# Altium PCB МПСУ.687251.22-02.PcbDoc
Units mm, origin at the board's own origin, x right, y up, seen from the top; angles counter-clockwise.
Board outline 55.5 x 18.5 mm, 2 copper layers (Top Layer, Bottom Layer), stack 2.036 mm thick; 28 components, 38 nets, 160 pads, 111 vias.
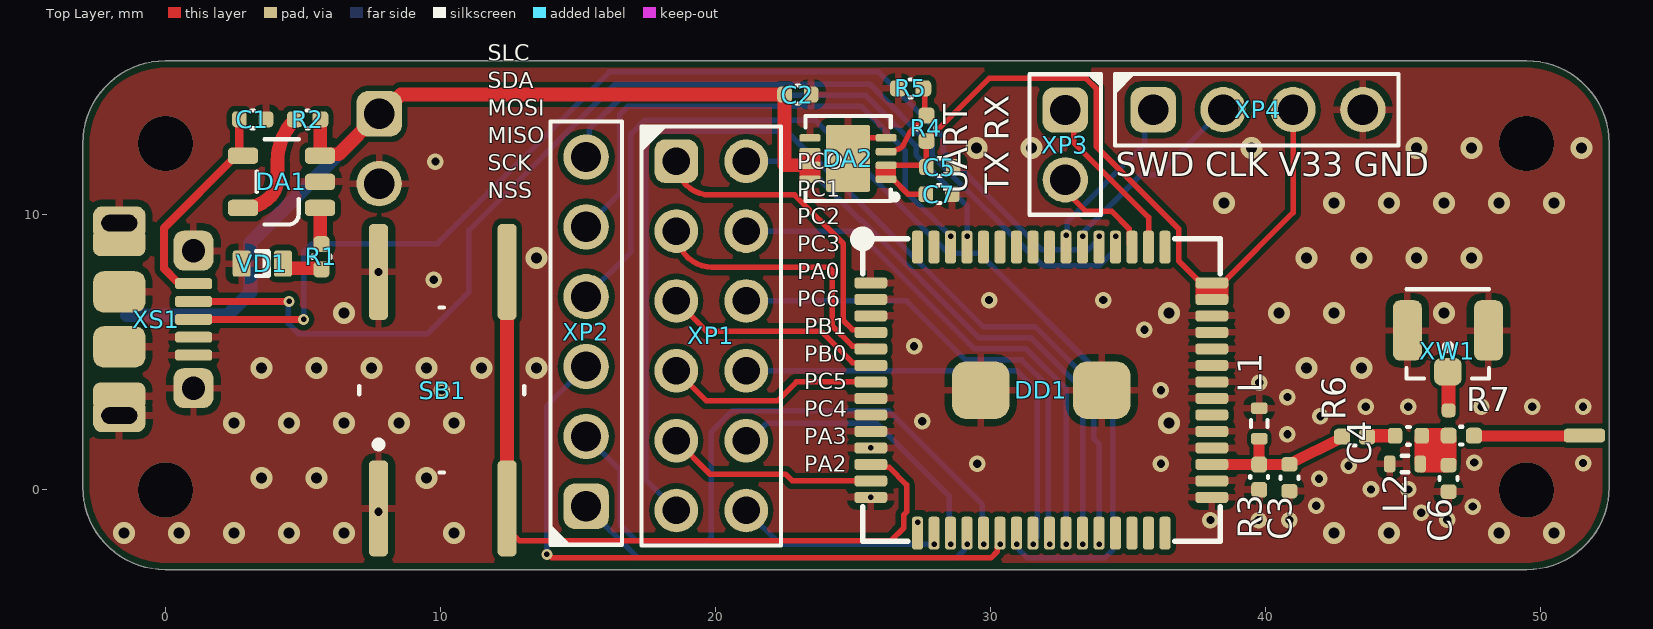
[diagram p0: Top Layer view]
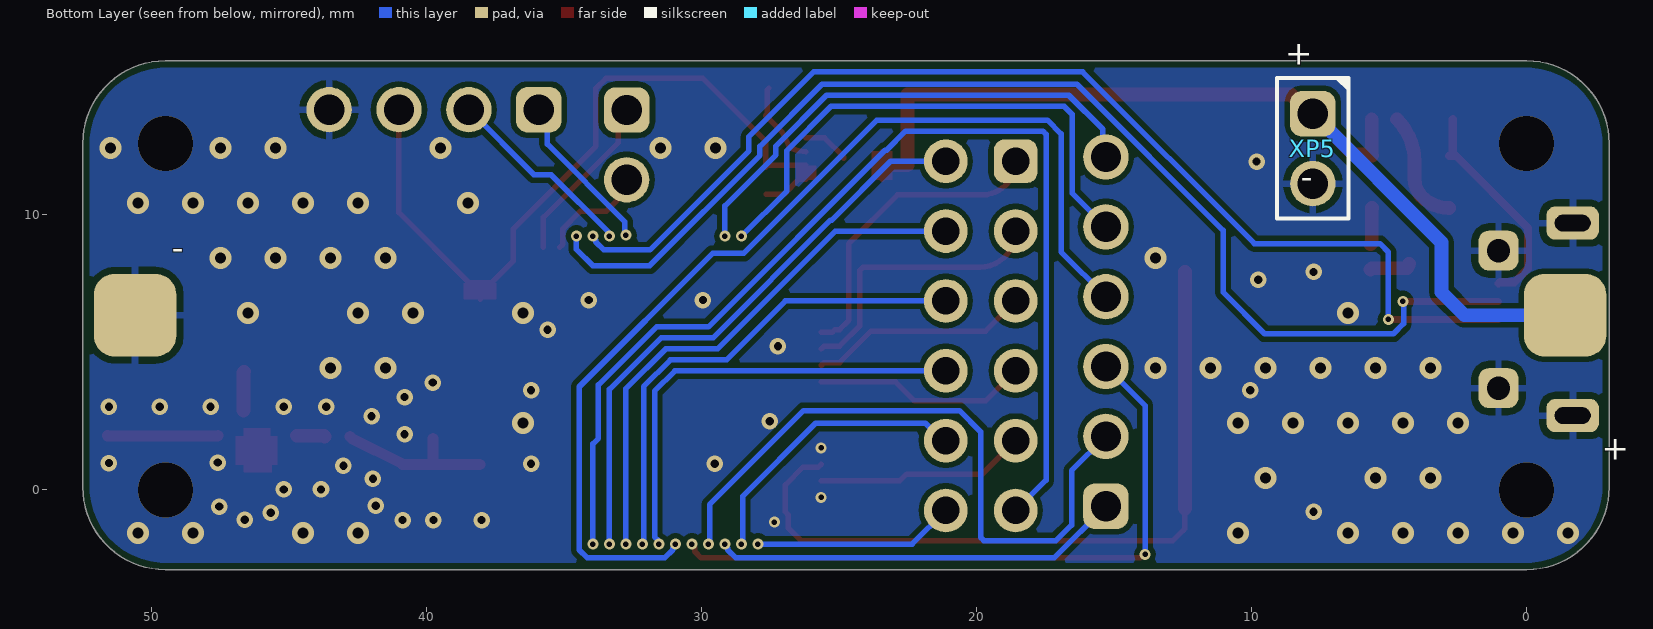
[diagram p1: Bottom Layer view, seen from below]
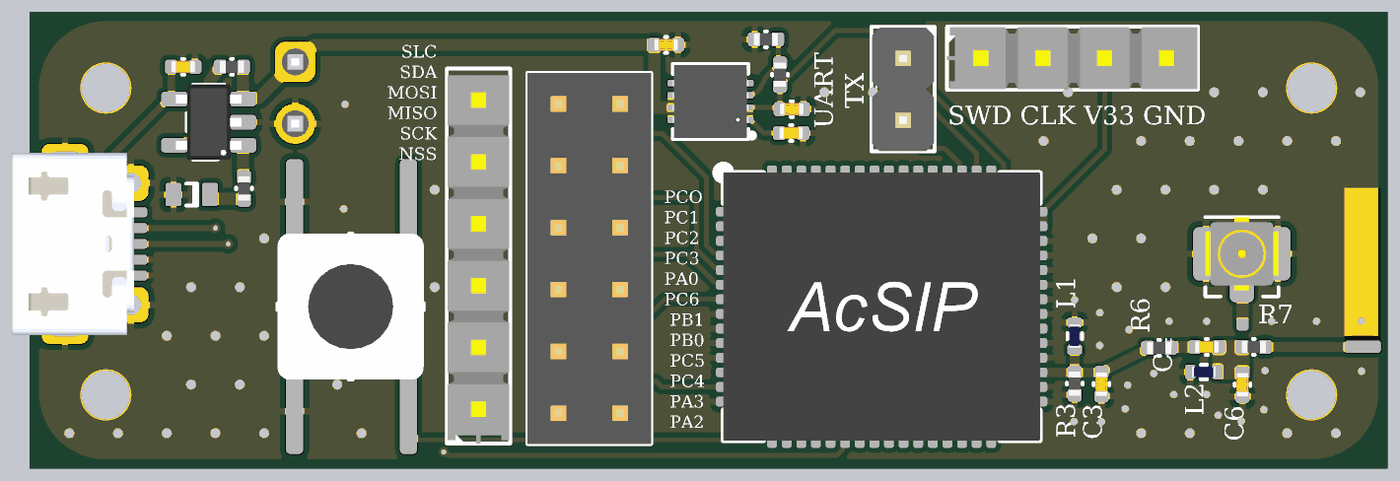
[diagram p2: 3D render of the assembled board from above, using the file's embedded part models]

## Layer stack, top to bottom
Top Solder: solder mask 0.0254, SM-001, Dk 4
Top Layer: signal copper 0.018
FR4: core 2, FR4, Dk 4.6
Bottom Layer: signal copper 0.018
Bottom Solder: solder mask 0.0254, SM-001, Dk 4

## Board outline
-3,0.098 -3,12.598 cw(c0,12.598) 0,15.598 49.5,15.598 cw(c49.5,12.598) 52.5,12.598 52.5,0.098 cw(c49.5,0.098) 49.5,-2.902 0,-2.902 cw(c0,0.098)

## Design rules (kind name [scope] priority, off if disabled: settings)
BoardOutlineClearance SolderMask [OnSolderMask] p1: gap=0 ignorepadtopadclearanceinfootprint=FALSE except(0.25: Arc-CavityEdge Arc-SplitContinuation Track-CavityEdge Track-SplitContinuation SMDPad-CavityEdge SMDPad-SplitContinuation THPad-CavityEdge THPad-SplitContinuation Via-CavityEdge Via-SplitContinuation Fill-CavityEdge Fill-SplitContinuation Poly-CavityEdge Poly-SplitContinuation Region-CavityEdge Region-SplitContinuation Text-CavityEdge Text-SplitContinuation)
BoardOutlineClearance [All] p2: gap=0.25 ignorepadtopadclearanceinfootprint=FALSE
Clearance Clearance_RF [All vs InNetClass('RF')] p1: gap=0.15 ignorepadtopadclearanceinfootprint=FALSE
Clearance [All] p2: gap=0.2 ignorepadtopadclearanceinfootprint=FALSE
ComponentClearance [All] p1: gap=0.25 collisioncheckmode=3 verticalgap=0.25 showdistances=FALSE
DiffPairsRouting [All] p1: maxlimit=0.25 minlimit=0.25 mostfreqgap=0.25 toplayer_minwidth=0.2 toplayer_maxwidth=1 toplayer_prefwidth=0.4 bottomlayer_minwidth=0.2 bottomlayer_maxwidth=1 bottomlayer_prefwidth=0.4 maxuncoupledlength=10
HoleSize [All] p1: absolutevalues=TRUE maxlimit=8 minlimit=0.3 maxpercent=80.000 minpercent=20.000
HoleToHoleClearance [All] p1: gap=0.3 allowstackedmicrovias=TRUE
MinimumSolderMaskSliver [All] p1: minsoldermaskwidth=0.15
PlaneClearance [All] p1: clearance=0.5
PlaneConnect [All] p1: planeconnectstyle=Relief reliefexpansion=0.5 reliefentries=4 reliefconductorwidth=0.25 reliefairgap=0.25
PolygonConnect [All] p1: thpad.connectstyle=Relief thpad.reliefconductorwidth=0.25 thpad.reliefentries=4 thpad.polygonreliefangle="90 Angle" thpad.airgapwidth=0.25 smdpad.connectstyle=Relief smdpad.reliefconductorwidth=0.25 smdpad.reliefentries=4 smdpad.polygonreliefangle="90 Angle" smdpad.airgapwidth=0.25 via.connectstyle=Direct via.reliefconductorwidth=0.25 via.reliefentries=4 via.polygonreliefangle="90 Angle" via.airgapwidth=0.25
ReturnPath [All] p1: impedanceprofileid={2CF304FD-49DA-4276-8468-CD12DB598121} _gaplimit=0.5
RoomDefinition "МПСУ.464414.22-01 Sheet1" [InComponentClass('МПСУ.464414.22-01 Sheet1')] p1: confinementstyle=ConfineIn formatcopy=TRUE lockcomponents=FALSE outline -663.5,-687.577 -612.7,-687.577 -612.7,-662.177 -663.5,-662.177
RoutingCorners [All] p1: cornerstyle=45-Degree minsetback=2.5 maxsetback=2.5
RoutingVias [All] p1: holewidth=0.2 width=0.4 viastyle="Through Hole" minholewidth=0 minwidth=0 maxholewidth=5 maxwidth=5
SilkToSilkClearance [All] p1: silktosilkclearance=0.05
SilkToSolderMaskClearance [IsPad] p1: minsilkscreentomaskgap=0.05 clearancetoexposedcopper=TRUE
SolderMaskExpansion [All] p1: expansion=0.05 istentingtop=FALSE
UnRoutedNet [All] p1: checkbadconnections=TRUE
Width [All] p1: maxlimit=3 minlimit=0.2 preferedwidth=0.25
19 further rules are at their usual default settings.

## Classes and differential pairs
net class RF: NetC4_1 NetC4_2 NetX1_1 RF

## Components (designator, comment, footprint, x,y, rotation, side; value= is the part's Value field where it differs from the comment)
C1 "100 мкФ ± 0 % 0 В  0402" CAPC100X50X55L20N 3.175,13.473 r180 top value="100 мкФ"
C2 "100 мкФ ± 0 % 0 В  0402" CAPC100X50X55L20N 23,14.373 r0 top value="100 мкФ"
C3 "TBD ± 0 % 0 В  0402" CAPC100X50X55L20N 40.875,0.438 r270 top value=TBD
C4 "56мкФ ± 0 % 0 В  0402" CAPC100X50X55L20N 45.201,1.966 r180 top value=56мкФ
C5 "100 мкФ ± 0 % 0 В  0402" CAPC100X50X55L20N 28.16,11.733 r180 top value="100 мкФ"
C6 "TBD ± 0 % 0 В  0402" CAPC100X50X55L20N 46.663,0.416 r270 top value=TBD
C7 "0.1 мкФ ± 0 % 0 В  0402" CAPC100X50X55L20N 28.135,10.748 r0 top value="0.1 мкФ"
DA1 "MCP73831T-2ACI/OT" SOTFL95P270X145-5N 4.225,11.198 r180 top
DA2 "LT1965*DD" SON9P50_300X300X80L40X25T244X160N 24.825,12.048 r90 top
DD1 "" S7XS 31.85,3.623 r0 top
L1 "TBD ± 0 % 0 А 0402" INDC100X50X60L10N 39.775,2.413 r90 top value=TBD
L2 "TBD ± 0 % 0 А 0402" INDC100X50X60L10N 45.076,0.941 r180 top value=TBD
R1 "470 Ом ± 0 % 0 Вт 0402" RESC100X50X40L25N 5.675,8.473 r270 top value="470 Ом"
R2 "5 кОм ± 0 % 0 Вт 0402" RESC100X50X40L25N 5.175,13.473 r0 top value="5 кОм"
R3 "0 Ом ± 0 % 0 Вт 0402" RESC100X50X40L25N 39.775,0.463 r270 top value="0 Ом"
R4 "4,42 кОм ± 0 % 0 Вт 0402" RESC100X50X40L25N 27.675,13.148 r90 top value="4,42 кОм"
R5 "3,01 кОм ± 0 % 0 Вт 0402" RESC100X50X40L25N 27.1,14.598 r180 top value="3,01 кОм"
R6 "0 Ом ± 0 % 0 Вт 0402" RESC100X50X40L25N 43.241,1.931 r0 top value="0 Ом"
R7 "0 Ом ± 0 % 0 Вт 0402" RESC100X50X40L25N 47.123,1.969 r0 top value="0 Ом"
SB1 "" KLS7-TS6601 10.05,3.623 r90 top
VD1 "KP-1608ZGC" KP-1608ZGC 3.525,8.223 r180 top
XP1 "DS1021-2x6SF11-B" HDRV12W64P254_6X2_1524X508H600 19.85,5.598 r270 top
XP2 "TSW-106-07-G-S" TSW-106-07-G-S 15.3,7.023 r90 top
XP3 "TSW-102-07-G-S" TSW-102-07-G-S 32.725,13.813 r270 top
XP4 "TSW-104-07-G-S" TSW-104-07-G-S 39.735,13.823 r0 top
XP5 "TSW-102-07-G-S" TSW-102-07-G-S 7.775,13.673 r270 bottom
XS1 "10118194-0001LF" micro_USB_TH -1.075,6.198 r270 top
XW1 "U.FL-LP1" U.FL-LP 46.638,5.794 r0 top

## Footprints (in the part's own frame and the unit in brackets; to place one, negate y for a bottom-side part, rotate by r counter-clockwise, add the part's x,y. Pads: shape width x height; smd on the part's side, far side on the other; paste and mask are expansions set on the pad)
CAPC100X50X55L20N [mm] "Capacitor, Chip; 1.00 mm L X 0.50 mm W X 0.55 mm H body"
  rrect50% 0.53x0.58 smd: 1(-0.485,0) 2(0.485,0)
  silkscreen extent -0.05,-0.33 0.05,0.33, body extent -0.5,-0.25 0.5,0.25, height 0.55
HDRV12W64P254_6X2_1524X508H600 [mm] "Header, Vertical, 2.54 mm pitch; 0.64 mm lead width, 12 pins, 2 rows, 6 pins per row, 15.24 mm L X 5.08 mm W X 6.00 mm H body"
  rrect50% 1.59x1.59 hole 1: 1(-6.35,-1.27)
  round 1.59 hole 1: 2(-6.35,1.27) 3(-3.81,-1.27) 4(-3.81,1.27) 5(-1.27,-1.27) 6(-1.27,1.27) 7(1.27,-1.27) 8(1.27,1.27) 9(3.81,-1.27) 10(3.81,1.27) 11(6.35,-1.27) 12(6.35,1.27)
  silkscreen extent -7.62,-2.54 7.62,2.54, body extent -7.62,-2.54 7.62,2.54, height 6
INDC100X50X60L10N [mm] "Inductor, Chip; 1.00 mm L X 0.50 mm W X 0.60 mm H body"
  rrect50% 0.42x0.61 smd: 1(-0.555,0) 2(0.555,0)
  silkscreen extent -0.13,-0.3 0.13,0.3, body extent -0.5,-0.25 0.5,0.25, height 0.6
KLS7-TS6601 [mm] "Button"
  rrect50% 3.5x0.7 smd: 1(-4.3,2.3) 1(4.3,2.3) 2(-4.3,-2.376) 2(4.3,-2.376)
  silkscreen extent -3,-3 3,3, body extent -3,-3 3,3, height 13
KP-1608ZGC [mm] "SODFL, 2-Leads, Body 0,80x1,60mm, IPC Medium Density"
  rrect25% 0.65x0.95 smd: 1(-0.75,0) 2(0.75,0)
  silkscreen extent -0.3,-0.45 0.23,0.45, body extent -0.8,-0.37 0.8,0.38, height 1.1
micro_USB_TH [mm]
  rrect50% 0.4x1.35 smd: 1(-1.3,2.1) 2(-0.65,2.1) 3(0,2.1) 4(0.65,2.1) 5(1.3,2.1)
  rrect50% 1.2x1.9 hole 1.3 slot 0.6 at 0 deg: 5(-3.5,-0.6) 5(3.5,-0.6)
  rrect50% 1x1.9 smd: 5(-2.8,-0.6) 5(2.8,-0.6)
  rrect50% 1.45x1.45 hole 0.85: 5(-2.5,2.1) 5(2.5,2.1)
  rrect50% 1.5x1.9 smd: 5(-1,-0.6) 5(1,-0.6)
  body extent -3.75,-2.77 3.75,2.24, height 2.64
RESC100X50X40L25N [mm] "Resistor, Chip; 1.00 mm L X 0.50 mm W X 0.40 mm H body"
  rrect50% 0.58x0.58 smd: 1(-0.46,0) 2(0.46,0)
  silkscreen extent -0.04,-0.33 0.04,0.33, body extent -0.5,-0.25 0.5,0.25, height 0.4
S7XS [mm] "S7XS"
  rrect50% 1.2x0.4 smd mask-0.05: 1(-6.2,3.9) 2(-6.2,3.3) 3(-6.2,2.7) 4(-6.2,2.1) 5(-6.2,1.5) 6(-6.2,0.9) 7(-6.2,0.3) 8(-6.2,-0.3) 9(-6.2,-0.9) 10(-6.2,-1.5) 11(-6.2,-2.1) 12(-6.2,-2.7) 13(-6.2,-3.3) 14(-6.2,-3.9) 31(6.2,-3.9) 32(6.2,-3.3) 33(6.2,-2.7) 34(6.2,-2.1) 35(6.2,-1.5) 36(6.2,-0.9) 37(6.2,-0.3) 38(6.2,0.3) 39(6.2,0.9) 40(6.2,1.5) 41(6.2,2.1) 42(6.2,2.7) 43(6.2,3.3) 44(6.2,3.9)
  rrect50% 0.4x1.2 smd mask-0.05: 15(-4.5,-5.2) 16(-3.9,-5.2) 17(-3.3,-5.2) 18(-2.7,-5.2) 19(-2.1,-5.2) 20(-1.5,-5.2) 21(-0.9,-5.2) 22(-0.3,-5.2) 23(0.3,-5.2) 24(0.9,-5.2) 25(1.5,-5.2) 26(2.1,-5.2) 27(2.7,-5.2) 28(3.3,-5.2) 29(3.9,-5.2) 30(4.5,-5.2) 45(4.5,5.2) 46(3.9,5.2) 47(3.3,5.2) 48(2.7,5.2) 49(2.1,5.2) 50(1.5,5.2) 51(0.9,5.2) 52(0.3,5.2) 53(-0.3,5.2) 54(-0.9,5.2) 55(-1.5,5.2) 56(-2.1,5.2) 57(-2.7,5.2) 58(-3.3,5.2) 59(-3.9,5.2) 60(-4.5,5.2)
  rrect50% 2.1x2.1 smd mask-0.05: 61(-2.2,0) 62(2.2,0)
  silkscreen extent -6.7,-5.5 6.5,5.7, body extent -6.5,-5.5 6.5,5.5, height 1.14
SON9P50_300X300X80L40X25T244X160N [mm] "Small Outline No-Lead (SON with Tab), 0.50 mm pitch; 8 pin, 3.00 mm L X 3.00 mm W X 0.80 mm H body"
  rrect50% 0.27x0.76 smd: 1(-0.75,-1.385) 2(-0.25,-1.385) 3(0.25,-1.385) 4(0.75,-1.385) 5(0.75,1.385) 6(0.25,1.385) 7(-0.25,1.385) 8(-0.75,1.385)
  rrect10% 2.44x1.6 smd: 9(0,0)
  silkscreen extent -1.55,-1.78 1.55,1.55, body extent -1.5,-1.55 1.5,1.55, height 0.8
SOTFL95P270X145-5N [mm] "SOTFL, 5-Leads, Body 2,90x2,70mm, Pitch 0,95mm, IPC Medium Density"
  rrect50% 1.1x0.6 smd: 1(-1.4,0.95) 2(-1.4,0) 3(-1.4,-0.95) 4(1.4,-0.95) 5(1.4,0.95)
  silkscreen extent -0.63,-1.55 0.9,1.55, body extent -1.35,-1.55 1.35,1.55, height 1.45
TSW-102-07-G-S [mm]
  rrect50% 1.65x1.65 hole 1.1: 1(0,0)
  round 1.65 hole 1.1: 2(2.54,0)
  silkscreen extent -1.3,-1.3 3.81,1.3, body extent -1.27,-1.27 3.81,1.27, height 8.38
TSW-104-07-G-S [mm]
  rrect50% 1.65x1.65 hole 1.1: 1(-3.81,0)
  round 1.65 hole 1.1: 2(-1.27,0) 3(1.27,0) 4(3.81,0)
  silkscreen extent -5.2,-1.3 5.1,1.3, body extent -5.21,-1.27 5.08,1.27, height 8.38
TSW-106-07-G-S [mm]
  rrect50% 1.65x1.65 hole 1.1: 1(-7.62,0)
  round 1.65 hole 1.1: 2(-5.08,0) 3(-2.54,0) 4(0,0) 5(2.54,0) 6(5.08,0)
  silkscreen extent -9.02,-1.3 6.38,1.3, body extent -9.02,-1.27 6.1,1.27, height 8.38
U.FL-LP [mm]
  rrect50% 1x1 smd: 1(0,-1.5)
  rrect50% 1.05x2.2 smd: 2(-1.475,0) 2(1.475,0)
  silkscreen extent -1.5,-1.75 1.5,1.5, body extent -1.5,-1.5 1.5,1.5, height 1.25

## Part data
C1 C2 C3 C4 C5 C6 C7: library part "C 0402", "Capacitor 0402", Package=0402, Tolerance="0 %", 3D_Body=+, Category=Passive, Designer=Свидерский, Peak_Condition="0 В", Status=Approved, Subcategory=Capacitor
DA1: library part MCP7383*, "Miniature Single-Cell, Fully Integrated Li-Ion, / Li-Polymer Charge Management Controllers", Manufacturer=Microchip, 3D_Body=+, Category=IC, ComponentLink1Description="Техническое описание", ComponentLink1URL=Q:\Libs\Descriptions_PDF\MCP73831-2.pdf, Designer=Лазба, PartNumber=MCP73831T-2ACI/OT, Status=Check, Subcategory="Power Supply"
DA2: "1.1A, Low Noise,  Low Dropout Linear Regulator", Manufacturer="Analog Devices", Package="8-LEAD (3mm × 3mm) PLASTIC DFN", 3D_Body=+, Category=IC, ComponentLink1Description="Техническое описание", ComponentLink1URL=Q:\Libs\Descriptions_PDF\LT1965.pdf, Designer=Свидерский, PartNumber=LT1965*DD, Status=Approved, Subcategory="Power Supply"
DD1: library part S76S, "The S76S is designed & manufactured in a smallest form factor - SiP ( System in Package ). It integrate with Semtech SX1276 and a 32-bit ultra low power Cortex M0L MCU ( STM32L073x ), supporting global 863MHz ~ 928MHz ISM-Bands.", Manufacturer=AcSIP, 3D_Body=+, Category=IC, ComponentLink1Description="Техническое описание", ComponentLink1URL="Q:\Libs\Descriptions_PDF\AcSIP S76S.pdf", Designer=Лазба, PartNumber=S76S, Status=Check, Subcategory=MCU
L1 L2: library part "L 0402", "Inductor 0402", Package=0402, Tolerance="0 %", 3D_Body=+, Category=Passive, Designer=Свидерский, Peak_Condition="0 А", Status=Approved, Subcategory=Inductor
R1 R2 R3 R4 R5 R6 R7: library part "R 0402", "Resistor 0402", Package=0402, Tolerance="0 %", 3D_Body=+, Category=Passive, Designer=Свидерский, Peak_Condition="0 Вт", Status=Approved, Subcategory=Resistor
SB1: library part KLS7-TS6601*, "6x6 Tact Switch Series", Manufacturer="KLS electronic co ltd", PartNumber=KLS7-TS6601-13-180, 3D_Body=+, Category=Passive, ComponentLink1Description="Техническое описание", ComponentLink1URL=Q:\Libs\Descriptions_PDF\KLS7-TS6601.pdf, Designer=Лазба, Status=Check, Subcategory=Button
VD1: library part KP-1608***, "1.6X0.8mm SMD CHIP LED LAMP", Manufacturer=Kingbright, Package="1.6mmX0.8mm SMD LED", 3D_Body=+, Category=Discrete, ComponentLink1Description="Техническое описание", ComponentLink1URL=Q:\Libs\Descriptions_PDF\KP-1608ZGC.pdf, Designer=Ушакова, PartNumber=KP-1608ZGC, Status=Approved, Subcategory=Diode
XP1: "Вилка 2,54мм", Manufacturer="Connfly Electronic", 3D_Body=+, Category=Connector, ComponentLink1Description="Техническое описание", ComponentLink1URL=Q:\Libs\Descriptions_PDF\DS1021.pdf, Designer=Свидерский, PartNumber=DS1021-2x6SF11-B, Pins=2x6, Pitch=2.54mm, Status=Approved, Subcategory=Male, System=Connector
XP2 XP4: "Вилка 2,54 мм", Manufacturer=Samtec, 3D_Body=+, Category=Connector, ComponentLink1Description="Техническое описание", ComponentLink1URL=Q:\Libs\Descriptions_PDF\tsw_th.pdf, Pitch=2.54mm, Status=Check, Subcategory=Male, System=Connector
  XP2: Designer=Лазба, PartNumber=TSW-106-07-G-S, Pins=1x6
  XP4: Designer=Затонская, PartNumber=TSW-104-07-G-S, Pins=1x4
XP3 XP5: "2x1 Вилка 2,54 мм", Manufacturer=Samtec, 3D_Body=+, Category=Connector, ComponentLink1Description="Техническое описание", ComponentLink1URL=Q:\Libs\Descriptions_PDF\tsw_th.pdf, Designer=Погорельский, PartNumber=TSW-102-07-G-S, Pins=2х1, Pitch=2.54mm, Status=Check, Subcategory=Male, System=Connector
XS1: "micro USB, Through Hole Mount", Manufacturer="Amphenal ICC", 3D_Body=+, Category=Connector, ComponentLink1Description="Техническое описание", ComponentLink1URL=Q:\Libs\Descriptions_PDF\10118194-0001LF.pdf, Designer=Свидерский, PartNumber=10118194-0001LF, Pins=5, Pitch=-, Status=Approved, Subcategory=microUSB, System=Connector
XW1: library part U.FL-R-SMT, "RF connector, Right Angle Jack PCB SMA Female End Launch Connector", Manufacturer="Hirose Electric", 3D_Body=+, Category=Connector, ComponentLink1Description="Техническое описание", ComponentLink1URL=Q:\Libs\Descriptions_PDF\U.FL-R-SMT(01).pdf, Designer=Лазба, PartNumber=U.FL-LP1, Pins=UFL, Status=Check, Subcategory=RF, System=Connector

## Free pads (board coordinates)
  rrect50% 0.5x0.5 smd: 1(46.663,2.889)
  rrect50% 3x3 smd far side: 8(-1.4,6.348) 8(50.6,6.348)
  rrect50% 1.5x0.5 smd: 8(51.6,1.973)

## Via types
v1: diameter 0.8, hole 0.4, Top Layer to Bottom Layer, tented both sides, 49 vias
v2: diameter 0.6, hole 0.3, Top Layer to Bottom Layer, tented both sides, 35 vias
v3: diameter 0.4, hole 0.2, Top Layer to Bottom Layer, tented both sides, 23 vias
v4: diameter 2/2 (per signal layer), hole 2, Top Layer to Bottom Layer, 4 vias

## Nets (pads, with @x,y where several pads share a name; then routed paths per layer and width w, separated by ;. In a path a pad name is that pad's centre, name@x,y a point inside that pad or via, vN(x,y) a via of type N, cw(c..) or ccw(c..) an arc to the next point about the centre after c; other vN are vias at no path point)
ACC_V: C2.1 DA1.3 DA2.6 DA2.7 DA2.8 pad.8@-1.4,6.348 R2.2 XP5.1 | length 36.9
  Top Layer w0.2: DA2.8 DA2.6
  Top Layer w0.5: DA1.3 DA1.3@5.635,12.148 ; R2.2 DA1.3@5.635,12.148 ; DA2.7 22.515,11.798 C2.1 8.563,14.373 7.863,13.673 XP5.1 6.3,12.198 5.685,12.198 DA1.3@5.635,12.148
  Bottom Layer w0.5: pad.8@-1.4,6.348 2.262,6.348 3.1,7.187 3.1,8.998 XP5.1
GND: C1.1 C2.2 C3.2 C5.1 C6.2 C7.2 DA1.2 DA2.4 DA2.5 DA2.9 DD1.1 DD1.2 DD1.3 DD1.8 DD1.9 DD1.10 DD1.11 DD1.14 DD1.15 DD1.31 DD1.32 DD1.34 DD1.35 DD1.37 DD1.38 DD1.39 DD1.40 DD1.41 DD1.42 DD1.61 DD1.62 L1.2 L2.2 pad.8@50.6,6.348 R3.2 R5.2 SB1.1 VD1.2 XP4.4 XP5.2 XS1.4 XS1.5 XW1.2 | length 1.7
  Top Layer w0.2: DA2.9 24.825,12.098 25.525,12.798 DA2.4
  other v1: -1.5,-1.576 0.5,-1.576 2.5,-1.576 4.5,-1.576 6.5,-1.576 10.5,-1.576 42.5,-1.576 44.5,-1.576 48.5,-1.576 50.5,-1.576 3.5,0.424 5.5,0.424 9.5,0.424 2.5,2.424 4.5,2.424 6.5,2.424 8.5,2.424 10.5,2.424 36.5,2.424 3.5,4.424 5.5,4.424 7.5,4.424 9.5,4.424 11.5,4.424 13.5,4.424 41.5,4.424 43.5,4.424 6.5,6.424 36.5,6.424 40.5,6.424 42.5,6.424 46.5,6.424 13.5,8.424 41.5,8.424 43.5,8.424 45.5,8.424 47.5,8.424 38.5,10.424 42.5,10.424 44.5,10.424 46.5,10.424 48.5,10.424 50.5,10.424 29.5,12.424 31.5,12.424 39.5,12.424 45.5,12.424 47.5,12.424 51.5,12.424
  other v2: 38,-1.102 39.75,-1.102 40.875,-1.102 46.616,-1.084 45.666,-0.834 7.75,-0.802 47.541,-0.609 41.85,-0.575 43.841,0.016 45.191,0.016 41.95,0.4 43.025,0.875 29.525,0.948 36.2,0.948 51.55,0.973 47.591,0.991 40.8,2.025 27.524,2.498 42,2.675 43.65,3.023 45.191,3.023 47.857,3.023 49.704,3.023 51.55,3.023 40.8,3.375 10.05,3.623 36.2,3.623 39.775,3.898 27.225,5.223 35.6,5.823 29.95,6.898 34.1,6.898 9.764,7.637 7.75,7.923 9.819,11.936
  other v3: 27.35,-1.177 25.65,-0.277 25.65,1.523
  other v4: 0,0 49.5,0 0,12.598 49.5,12.598
NetC1_2: C1.2 DA1.4 XS1.1 | length 8.1
  Top Layer w0.3: XS1.1 0.975,7.548 0.442,7.548 -0.05,8.041 -0.05,9.523 2.575,12.148 DA1.4 cw(c2.825,12.283) 2.69,12.283 C1.2
NetC4_1: C4.1 C6.1 L2.1 R7.1
NetC4_2: C4.2 R6.2 | length 1
  Top Layer w0.5: R6.2 cw(c43.785,1.847) 43.785,1.966 C4.2
NetDA1_1: DA1.1 R1.1 | length 1.3
  Top Layer w0.5: DA1.1 5.635,10.198 5.635,8.973 R1.1
NetDA1_5: DA1.5 R2.1 | length 4.2
  Top Layer w0.5: DA1.5 ccw(c2.825,11.637) 3.807,10.655 ccw(c3.159,11.303) 4.075,11.303 4.075,11.928 cw(c6.26,11.928) R2.1
NetDA2_3: DA2.3 R4.2 R5.1 | length 3.1
  Top Layer w0.2: DA2.3 26.49,12.333 26.637,12.382 ccw(c26.523,12.731) 26.849,12.562 27.085,13.018 R4.2 27.617,13.666 27.617,14.541 R5.1
NetDD1_12: DD1.12 SB1.2 | length 27.4
  Top Layer w0.2: SB1.2@12.426,-0.677 12.426,-1.411 12.476,-1.461 12.862,-1.847 26.388,-1.847 26.85,-1.385 26.85,-0.911 26.957,-0.804 26.957,0.182 26.316,0.823 25.75,0.823 DD1.12
  Top Layer w0.5: SB1.2@12.426,-0.677 SB1.2@12.426,7.923
NetR1_2: R1.2 VD1.1 | length 1.5
  Top Layer w0.5: VD1.1 4.35,8.053 5.635,8.053 R1.2
NetR7_2: pad.8@51.6,1.973 R7.2 | length 4
  Top Layer w0.4: R7.2 47.591,1.961 47.607,1.961 51.6,1.961 pad.8@51.6,1.973
NetX1_1: pad.1 XW1.1 | length 1.4
  Top Layer w0.5: XW1.1 cw(c46.578,4.233) 46.663,4.233 pad.1
PA0: DD1.13 XP1.9 | length 7.7
  Top Layer w0.2: XP1.9 19.795,0.573 22.55,0.573 22.8,0.323 DD1.13
PA2: DD1.16 XP1.12 | length 7.3
  Bottom Layer w0.2: XP1.12 22.345,-1.977 v3(27.95,-1.977)
PA3: DD1.17 XP1.10 | length 10.5
  Bottom Layer w0.2: XP1.10 21.233,1.788 21.868,2.423 25.85,2.423 28.512,-0.238 28.512,-1.938 v3(28.55,-1.977)
PB0: DD1.24 XP1.4 | length 19.7
  Bottom Layer w0.2: XP1.4 25.14,9.408 29.42,5.128 31.304,5.128 32.75,3.683 v3(32.75,-1.977)
PB1: DD1.25 XP1.2 | length 21.3
  Bottom Layer w0.2: XP1.2 23.125,11.948 25.265,9.808 25.306,9.808 29.586,5.528 31.47,5.528 33.35,3.648 v3(33.35,-1.977)
PC0: DD1.4 XP1.1 | length 11.5
  Top Layer w0.2: XP1.1 ccw(c19.805,11.948) 19.805,10.723 22.878,10.723 24.65,8.951 24.65,6.158 24.984,5.823 25.033,5.823 25.15,5.823 25.25,5.723 DD1.4
PC1: DD1.5 XP1.3 | length 10.2
  Top Layer w0.2: XP1.3 ccw(c19.89,9.408) 19.89,8.098 24.133,8.098 24.25,7.981 24.25,5.958 24.984,5.223 25.033,5.223 25.55,5.223 DD1.5
PC2: DD1.6 XP1.5 | length 8
  Top Layer w0.2: XP1.5 19.675,5.773 23.834,5.773 24.984,4.623 25.55,4.623 DD1.6
PC3: DD1.7 XP1.7 | length 7.8
  Top Layer w0.2: XP1.7 19.675,3.233 22.256,3.233 22.946,3.923 DD1.7
PC4: DD1.22 XP1.8 | length 16.5
  Bottom Layer w0.2: XP1.8 30.973,4.328 31.712,3.59 31.712,-1.708 31.588,-1.831 31.588,-1.938 v3(31.55,-1.977)
PC5: DD1.23 XP1.6 | length 18
  Bottom Layer w0.2: XP1.6 26.955,6.868 29.095,4.728 31.139,4.728 32.112,3.755 32.112,-1.938 v3(32.15,-1.977)
PC6: DD1.26 XP1.11 | length 40.2
  Bottom Layer w0.2: XP1.11 17.475,0.353 17.475,12.926 17.592,13.043 22.58,13.043 23.275,12.348 23.331,12.348 29.751,5.928 31.636,5.928 33.75,3.814 33.75,1.873 33.95,1.673 v3(33.95,-1.977)
RF: C3.1 DD1.33 L1.1 R3.1 R6.1 | length 5.9
  Top Layer w0.4: DD1.33 R3.1 ; L1.1 R3.1 ; R6.1 42.691,1.841 40.965,0.988 C3.1 R3.1
SCL: DD1.57 XP2.6 | length 18.3
  Bottom Layer w0.2: XP2.6 15.413,12.216 15.413,13.111 16.65,14.348 25.453,14.348 27.3,12.502 27.3,12.176 29.15,10.326 v3(29.15,9.223)
SDA: DD1.58 XP2.5 | length 19.6
  Bottom Layer w0.2: XP2.5 16.525,10.788 16.525,13.658 16.816,13.948 25.288,13.948 26.9,12.336 26.9,10.874 v3(28.55,9.223)
SPI1_NSS: DD1.18 XP2.1 | length 14.9
  Bottom Layer w0.2: XP2.1 17.18,-2.477 28.757,-2.477 29.05,-2.184 29.05,-2.131 29.15,-2.031 v3(29.15,-1.977)
SPI_MISO: DD1.20 XP2.3 | length 24.3
  Top Layer w0.2: v3(13.875,-2.347) 13.929,-2.347 14.059,-2.477 30.016,-2.477 30.25,-2.242 30.25,-2.077 v3(30.35,-1.977)
  Bottom Layer w0.2: v3(13.875,-2.347) 13.875,3.058 XP2.3
SPI_MOSI: DD1.21 XP2.4 | length 38.2
  Bottom Layer w0.2: XP2.4 16.925,8.648 16.925,12.942 17.426,13.443 23.623,13.443 28.47,8.596 29.603,8.596 34.45,3.748 34.45,-2.184 34.157,-2.477 31.343,-2.477 31.05,-2.184 31.05,-2.131 30.95,-2.031 v3(30.95,-1.977)
SPI_SCK: DD1.19 XP2.2 | length 24.2
  Bottom Layer w0.2: XP2.2 16.548,0.695 16.548,-1.279 17.116,-1.847 19.733,-1.847 19.85,-1.73 19.85,2.106 20.627,2.883 26.29,2.883 29.712,-0.538 29.712,-1.938 v3(29.75,-1.977)
SWCLK: DD1.50 XP4.2 | length 7.1
  Bottom Layer w0.2: v3(33.35,9.223) 33.388,9.262 33.388,9.369 35.477,11.457 36.099,11.457 XP4.2
SWDIO: DD1.51 XP4.1 | length 5.9
  Bottom Layer w0.2: v3(32.75,9.263) 32.788,9.301 32.788,9.746 35.612,12.57 35.612,13.511 XP4.1
U_RX: DD1.46 XP3.1 | length 6.2
  Top Layer w0.2: XP3.1 33.037,13.501 33.037,12.617 35.75,9.905 DD1.46
U_TX: DD1.47 XP3.2 | length 4
  Top Layer w0.2: XP3.2 32.725,10.881 33.285,10.321 33.285,10.313 33.475,10.123 34.416,10.123 35.05,9.489 35.05,8.923 DD1.47
USB_DM: DD1.48 XS1.2 | length 43.2
  Top Layer w0.25: XS1.2 4.498,6.848 v3(4.5,6.85)
  Bottom Layer w0.2: v3(4.5,6.85) 4.475,6.825 4.475,6.043 4.843,5.675 9.527,5.675 11.039,7.187 11.039,9.433 16.354,14.748 25.619,14.748 27.881,12.486 27.881,12.16 31.893,8.148 33.954,8.148 34.55,8.744 v3(34.55,9.223)
USB_DP: DD1.49 XS1.3 | length 41.3
  Top Layer w0.25: XS1.3 4.373,6.198 4.375,6.2 v3(5.025,6.2)
  Bottom Layer w0.2: v3(5.025,6.2) 5.025,8.639 5.336,8.95 9.9,8.95 16.148,15.198 25.927,15.198 28.281,12.844 28.281,12.326 31.884,8.723 33.557,8.723 33.85,9.016 33.85,9.069 33.95,9.169 v3(33.95,9.223)
VDD33: C5.2 C7.1 DA2.1 DA2.2 DD1.43 DD1.44 R4.1 XP4.3 | length 28.8
  Top Layer w0.2: DA2.1 26.455,11.298 27.005,10.748 C7.1 ; DA2.2 27.61,11.798 C5.2 R4.1 29.95,14.963 33.483,14.963 33.85,14.596 33.85,12.489 36.85,9.489 36.85,8.323 37.65,7.523 DD1.44 ; DD1.43 38.05,7.223 DD1.44 ; XP4.3 41.005,10.078 38.45,7.523 DD1.44
pads on no net: DD1.27 DD1.28 DD1.29 DD1.30 DD1.36 DD1.45 DD1.52 DD1.53 DD1.54 DD1.55 DD1.56 DD1.59 DD1.60

## Polygon pours and split planes (outlines as drawn)
GND on Bottom Layer "GND_L02_P005" (solid, pour order 5): -3,0.098 -3,12.598 cw(c0,12.598) 0,15.598 49.5,15.598 cw(c49.5,12.598) 52.5,12.598 52.5,0.098 cw(c49.5,0.098) 49.5,-2.902 0,-2.902 cw(c0,0.098)
GND on Top Layer "GND_L01_P004" (solid, pour order 4): -3,0.098 -3,12.598 cw(c0,12.598) 0,15.598 49.5,15.598 cw(c49.5,12.598) 52.5,12.598 52.5,0.098 cw(c49.5,0.098) 49.5,-2.902 0,-2.902 cw(c0,0.098)

## Other copper
Top Layer:
  rectangle net NetC4_1: 45.631,0.636 46.663,0.966
  rectangle net NetC4_1: 45.686,1.762 46.663,2.256
  rectangle net NetC4_1: 45.421,0.901 46.953,1.966
  rectangle net VDD33: 37.45,6.923 38.65,7.523
  rectangle net ACC_V: 23.06,11.273 23.825,12.323
  rectangle net VDD33: 25.825,11.273 26.575,11.798

## Silkscreen, mask and mechanical layers (free items; w line width, h text height)
Top Overlay:
  text "SWD CLK V33 GND" at 34.561,11.105 h1.5
  text "UART / TX RX" at 30.95,10.775 h1.5 r90
  text "SLC / SDA / MOSI / MISO / SCK / NSS" at 11.718,10.398 h1
  text "PCO / PC1 / PC2 / PC3 / PA0 / PC6 /  PB1 /  PB0 /  PC5 /  PC4 /  PA3 /  PA2" at 22.975,0.448 h1
Bottom Overlay:
  text "+ /  /  / -" at 7.777,10.673 h1.5
  text "-" at 48.826,8.088 h1.5
  text "+" at -3.723,0.8 h1.5
Top Solder:
  rectangle: 50.85,1.973 52.35,8.5
Board Outline:
  the board outline again, w0.25
Board Information:
  lines w0.25: -8.225,4.098 -8.225,-2.902 0,-2.902 ; -8.225,8.598 -8.225,15.598 0,15.598 ; -3,12.598 -3,18.598 22.5,18.598 ; 27,18.598 52.5,18.598 ; 52.5,12.598 52.5,18.598 ; 53.3,18.598 52.5,18.598 ; 56.9,18.598 57.7,18.598 57.7,12.598
  text "55.5" at 23.5,18.311 h1.5
  text "5.2" at 54.2,18.311 h1.5
  text "18,5" at -8.014,5 h1.5 r90